# Altium PCB v4.PcbDoc
Units mil, origin at the board's own origin, x right, y up, seen from the top; angles counter-clockwise.
Board outline 6440.66 x 6115.99 mil, 2 copper layers (Top Layer, Bottom Layer 1); 117 components, 72 nets, 348 pads, 98 vias.
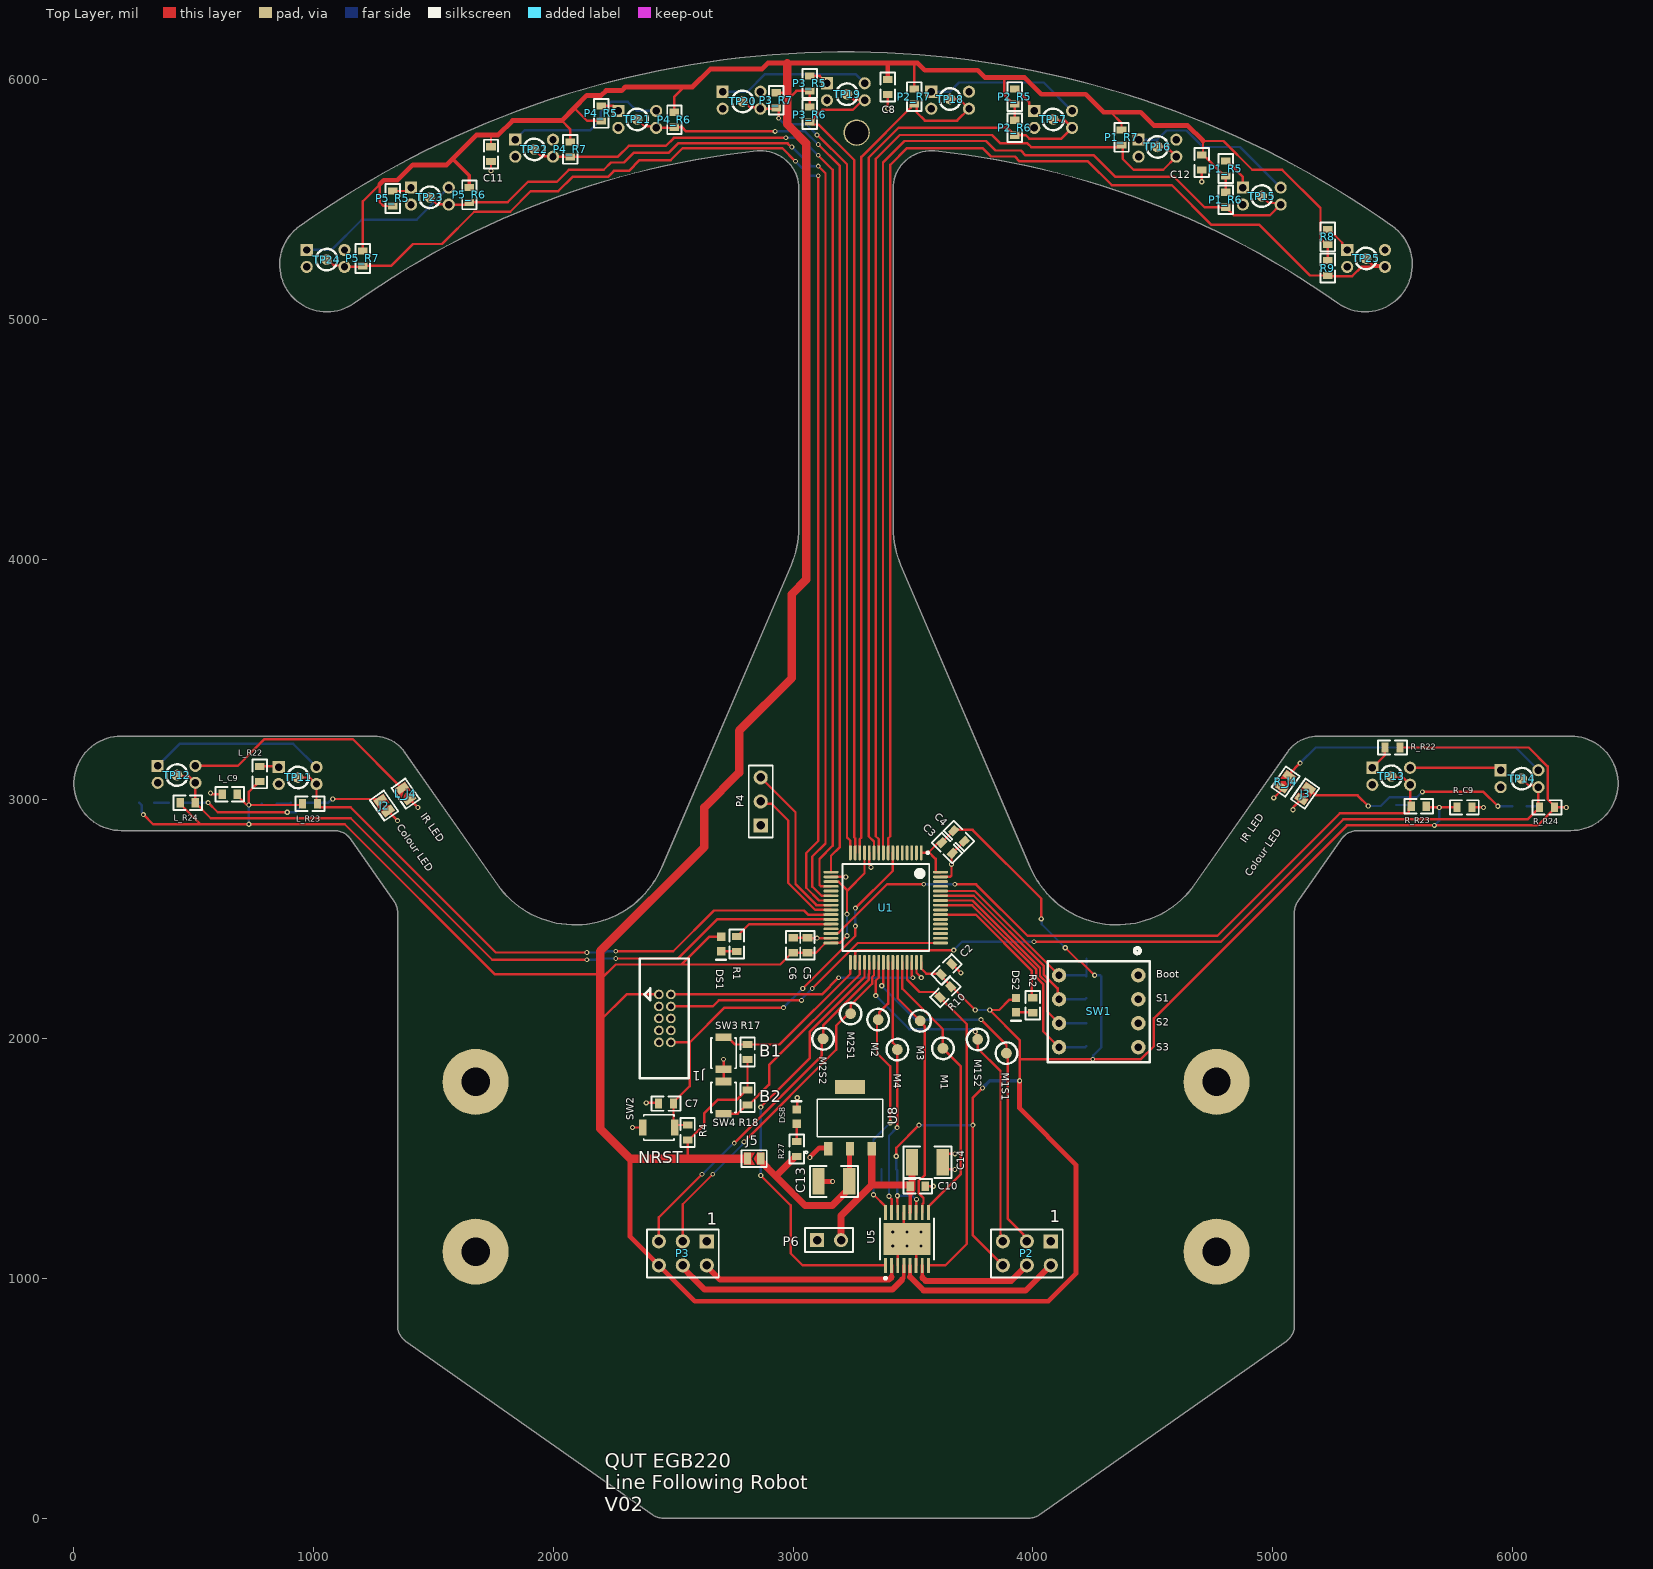
[diagram p0: Top Layer view]
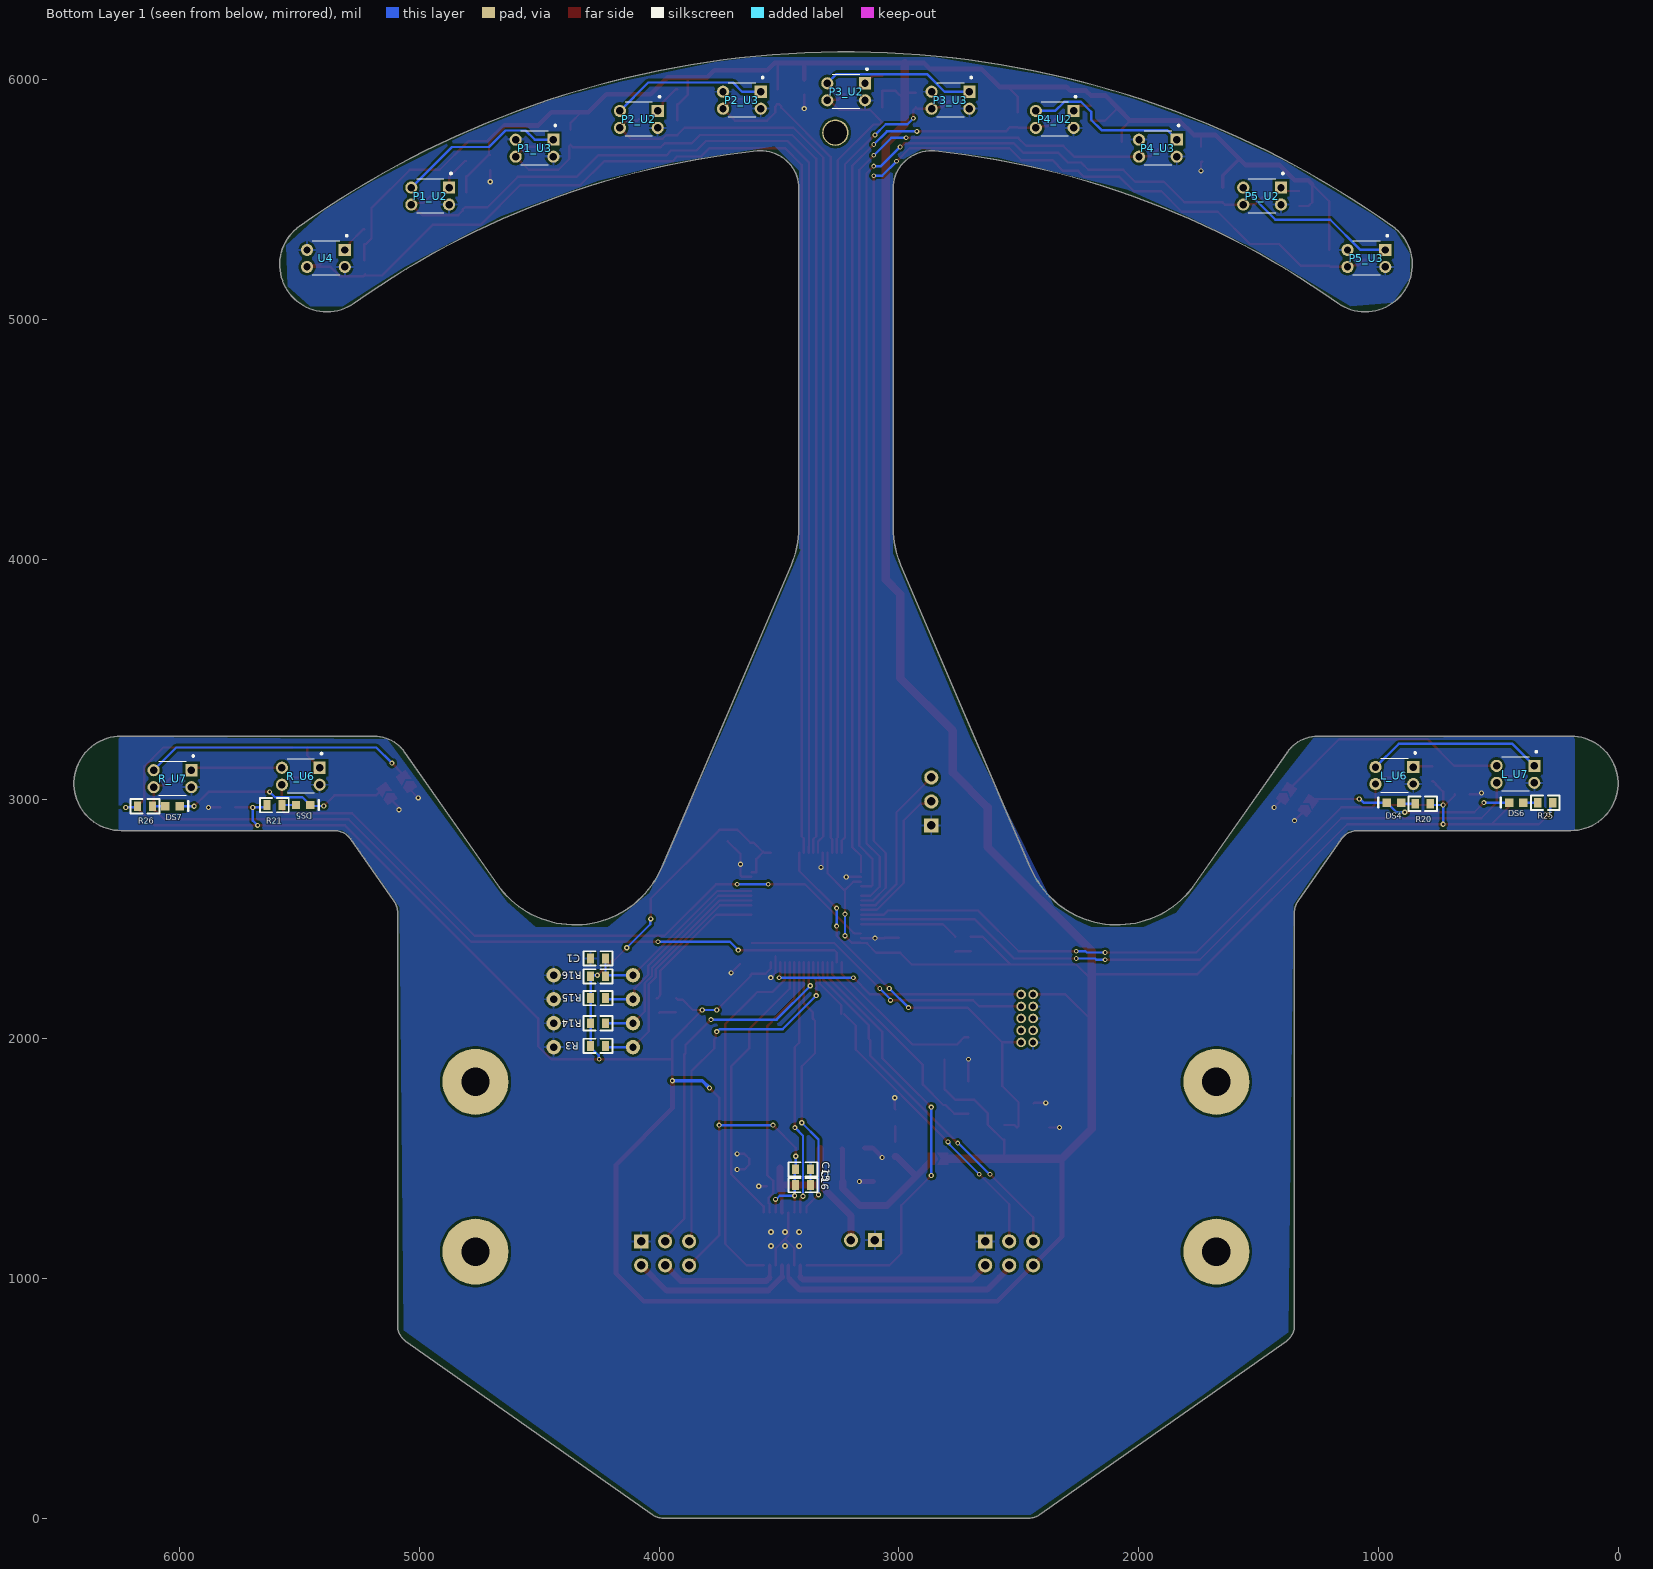
[diagram p1: Bottom Layer 1 view, seen from below]
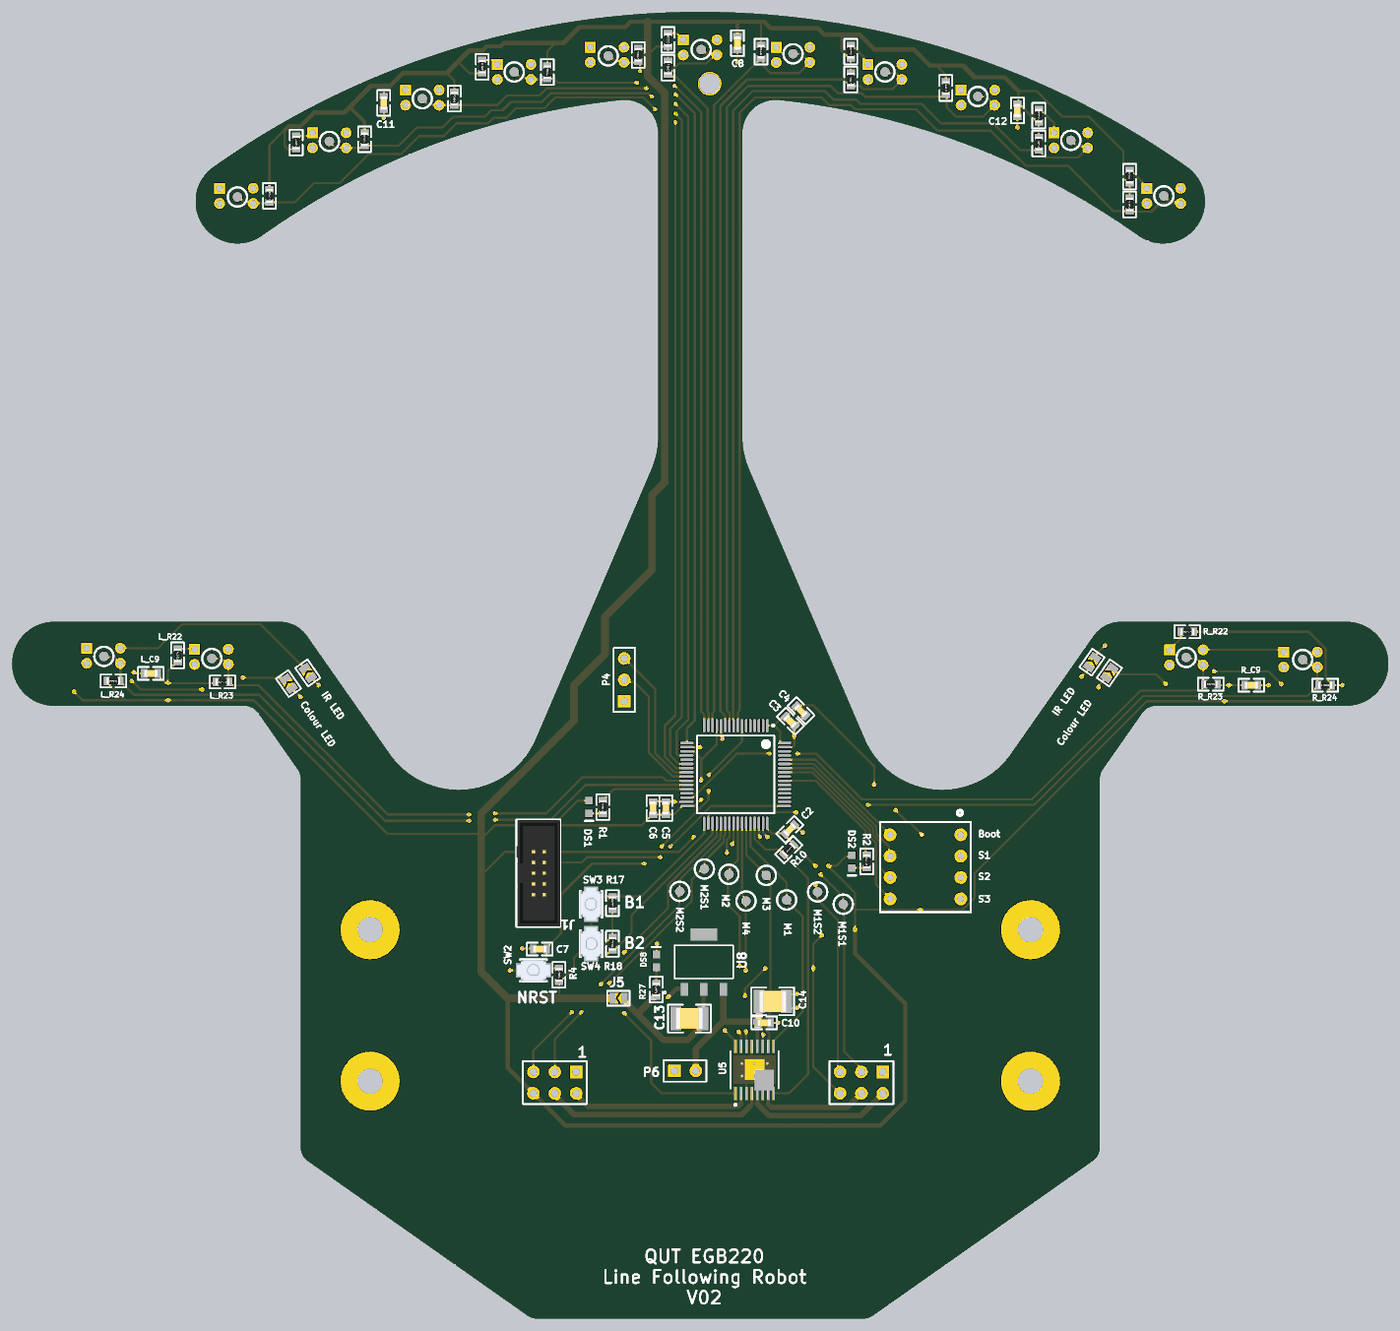
[diagram p2: 3D render of the assembled board from above, using the file's embedded part models]

## Layer stack, top to bottom
Top Solder: solder mask 1, SM-002, Dk 4
Top Layer: signal copper 1.4
Dielectric 1: prepreg 12.6, Composite dielectric, Dk 4.1
Bottom Layer 1: signal copper 1.4
Bottom Solder: solder mask 1, SM-002, Dk 4

## Board outline
1384.07,738.54 cw(c1429.38,802.94) 1350.64,802.94 1350.64,2526.66 ccw(c1271.9,2526.66) 1336.4,2571.82 1152.27,2834.78 ccw(c1087.77,2789.62) 1087.77,2868.36 197.1,2868.36 cw(c197.1,3065.21) 197.1,3262.06 1251.73,3262.06 cw(c1251.73,3104.58) 1380.73,3194.91 1767.09,2643.14 ccw(c2089.59,2868.96) 2451.45,2713.86 2992.04,3975.18 ccw(c2630.17,4130.28) 3023.87,4130.28 3023.87,5546.62 ccw(c2866.39,5546.62) 2849.91,5703.23 ccw(c3220.72,2179.38) 1169.33,5068.47 cw(c1055.37,5228.98) 941.4,5389.48 cw(c3220.72,2179.38) 5500.04,5389.48 cw(c5386.08,5228.98) 5272.11,5068.47 ccw(c3220.72,2179.38) 3591.53,5703.23 ccw(c3575.05,5546.62) 3417.57,5546.62 3417.57,4130.28 ccw(c3811.27,4130.28) 3449.41,3975.18 3989.99,2713.86 ccw(c4351.86,2868.96) 4674.36,2643.14 5060.71,3194.91 cw(c5189.71,3104.58) 5189.71,3262.06 6244.34,3262.06 cw(c6244.34,3065.21) 6244.34,2868.36 5353.67,2868.36 ccw(c5353.67,2789.62) 5289.17,2834.78 5105.04,2571.82 ccw(c5169.54,2526.66) 5090.8,2526.66 5090.8,802.94 cw(c5012.06,802.94) 5057.37,738.54 4028.51,14.59 cw(c3983.2,78.99) 3983.2,0.25 2458.25,0.25 cw(c2458.25,78.99) 2412.94,14.59

## Design rules (kind name [scope] priority, off if disabled: settings)
Clearance [All] p1: gap=10 ignorepadtopadclearanceinfootprint=FALSE except(0: Arc-Hole Track-Hole SMDPad-Hole THPad-Hole Via-Hole Fill-Hole Poly-Hole Region-Hole Text-Hole; 5: Arc-Arc Arc-Track Arc-SMDPad Track-Track Track-SMDPad SMDPad-SMDPad; 8: Arc-THPad Arc-Via Track-THPad Track-Via SMDPad-THPad SMDPad-Via THPad-THPad THPad-Via)
PlaneConnect [All] p1: pad.planeconnectstyle=Relief pad.reliefexpansion=20 pad.reliefentries=4 pad.reliefconductorwidth=15 pad.reliefairgap=10 via.planeconnectstyle=Direct via.reliefexpansion=20 via.reliefentries=4 via.reliefconductorwidth=10 via.reliefairgap=10
PolygonConnect [All] p1: thpad.connectstyle=Relief thpad.reliefconductorwidth=10 thpad.reliefentries=4 thpad.polygonreliefangle="90 Angle" thpad.airgapwidth=10 smdpad.connectstyle=Relief smdpad.reliefconductorwidth=10 smdpad.reliefentries=4 smdpad.polygonreliefangle="90 Angle" smdpad.airgapwidth=10 via.connectstyle=Direct via.reliefconductorwidth=10 via.reliefentries=4 via.polygonreliefangle="90 Angle" via.airgapwidth=10
RoomDefinition R [InComponentClass('R')] p1: confinementstyle=ConfineIn formatcopy=TRUE lockcomponents=FALSE outline 4780,2685 6275,2685 6275,3365 4780,3365
RoomDefinition "Power Supply" [InComponentClass('Power Supply')] p2 off: confinementstyle=ConfineIn formatcopy=TRUE lockcomponents=FALSE outline 3625,850 3625,1780 2970,1780 2970,850
RoomDefinition EGB220 [InComponentClass('EGB220')] p3 off: confinementstyle=ConfineIn formatcopy=TRUE lockcomponents=FALSE outline 2205,1385 4735,1385 4735,3918.13 2205,3918.13
RoomDefinition P4 [InComponentClass('P4')] p4 off: confinementstyle=ConfineIn formatcopy=TRUE lockcomponents=FALSE outline 1740,5535 2550,5535 2550,5955 1740,5955
RoomDefinition P1 [InComponentClass('P1')] p5 off: confinementstyle=ConfineIn formatcopy=TRUE lockcomponents=FALSE outline 4330,5210 5140,5210 5140,5905 4330,5905
RoomDefinition L [InComponentClass('L')] p6: confinementstyle=ConfineIn formatcopy=TRUE lockcomponents=FALSE outline 220.37,2697.94 1750,2697.94 1750,3377.94 220.37,3377.94
RoomDefinition P2 [InComponentClass('P2')] p7 off: confinementstyle=ConfineIn formatcopy=TRUE lockcomponents=FALSE outline 3445,5575 4235,5575 4235,6140 3445,6140
RoomDefinition "Front Sense Array" [InComponentClass('Front Sense Array')] p8 off: confinementstyle=ConfineIn formatcopy=TRUE lockcomponents=FALSE outline 5155,5000 5605,5000 5605,5505 5155,5505
RoomDefinition P5 [InComponentClass('P5')] p9 off: confinementstyle=ConfineIn formatcopy=TRUE lockcomponents=FALSE outline 855,5090 1695,5090 1695,5640 855,5640
RoomDefinition P3 [InComponentClass('P3')] p10 off: confinementstyle=ConfineIn formatcopy=TRUE lockcomponents=FALSE outline 2570,5725 3345,5725 3345,6105 2570,6105
RoomDefinition "Motor Control" [InComponentClass('Motor Control')] p11: confinementstyle=ConfineIn formatcopy=TRUE lockcomponents=FALSE outline 1760,755 4660,755 4660,2285 1760,2285
RoutingVias [All] p1: holewidth=11 width=20 viastyle="Through Hole" minholewidth=11 minwidth=20 maxholewidth=28 maxwidth=50
SolderMaskExpansion [All] p1: expansion=4 istentingtop=FALSE
Width [All] p1: maxlimit=35 minlimit=10 preferedwidth=10 minimp=50.000000 maximp=50.000000 favimp=50.000000
29 further rules are at their usual default settings.

## Classes and differential pairs
channel class SideSense: L R
channel class SensePair: L P1 P2 P3 P4 P5 R
net class M2Sense[1..2]: M2Sense1 M2Sense2
net class M1Sense[1..2]: M1Sense1 M1Sense2
net class FADC[1..11]: FADC1 FADC2 FADC3 FADC4 FADC5 FADC6 FADC7 FADC8 FADC9 FADC10 FADC11
component class P5: P5_R5 P5_R6 P5_R7 P5_U2 P5_U3
component class P4: P4_R5 P4_R6 P4_R7 P4_U2 P4_U3
component class P3: P3_R5 P3_R6 P3_R7 P3_U2 P3_U3
component class P2: 10K 47R P2_R5 P2_R6 P2_R7 P2_U2 P2_U3
component class P1: 10K 47R P1_R5 P1_R6 P1_R7 P1_U2 P1_U3
component class R: R_C9 R_J4 R_R22 R_R23 R_R24 R_U6 R_U7
component class "Power Supply": C13 DS8 J5 P6 R27 U8
component class "Motor Control": 3 C10 C14 C15 C16 M1 M1S1 M1S2 M2 M2S1 M2S2 M3 M4 P2 P3 R10 U5
component class L: L_C9 L_J4 L_R22 L_R23 L_R24 L_U6 L_U7
component class "Front Sense Array": 10K 100R C8 R8 R9 TP15 TP16 TP17 TP18 TP19 TP20 TP21 TP22 TP23 TP24 TP25 U4
component class EGB220: C1 C2 C3 C4 C5 C6 C7 C11 C12 DS1 DS2 DS4 DS5 DS6 DS7 J1 J2 J3 P4 R1 R2 R3 R4 R14 R15 R16 R17 R18 R20 R21 R25 R26 SW1 SW2 SW3 SW4 TP11 TP12 TP13 TP14 U1

## Components (designator, comment, footprint, x,y, rotation, side; value= is the part's Value field where it differs from the comment)
C1 "100nF" Cap_Ceramic_0603 4255,2335 r180 bottom
C2 "100nF" Cap_Ceramic_0603 3640,2290 r225 top
C3 "100nF" Cap_Ceramic_0603 3642.32,2796.11 r135 top
C4 "100nF" Cap_Ceramic_0603 3691.82,2845.61 r135 top
C5 "100nF" Cap_Ceramic_0603 3060,2390 r270 top
C6 "4u7" Cap_Ceramic_0603 3000,2390 r270 top
C7 "100nF" Cap_Ceramic_0603 2470,1730 r0 top
C8 "100nF" Cap_Ceramic_0603 3395,5970 r90 top
C10 "100nF 100V 5% X7R 0603" Cap_Ceramic_0603 3520,1385 r180 top
C11 "100nF" Cap_Ceramic_0603 1740,5690 r90 top
C12 "100nF" Cap_Ceramic_0603 4705,5655 r90 top
C13 "47uF 16V 10% X7R 1210" Cap_Ceramic_1210 3170,1405 r0 top
C14 "47uF 16V 10% X7R 1210" Cap_Ceramic_1210 3560,1485 r180 top
C15 "100nF 100V 5% X7R 0603" Cap_Ceramic_0603 3400,1455 r0 bottom
C16 "4u7 50V 5% X7R 0603" Cap_Ceramic_0603 3400,1390 r0 bottom
DS1 "LED Green 0603" "LED GREEN 0603" 2700,2395 r270 top
DS2 "LED Blue 0603" "LED BLUE 0603" 3930,2140 r270 top
DS4 "LED Green 0603" "LED GREEN 0603" 935,2985 r0 bottom
DS5 "LED Green 0603" "LED GREEN 0603" 5485,2975 r180 bottom
DS6 "LED Green 0603" "LED GREEN 0603" 425,2985 r0 bottom
DS7 "LED Green 0603" "LED GREEN 0603" 6030,2970 r180 bottom
DS8 "LED Red 0603" "LED RED 0603" 3015,1675 r90 top
J1 "IDC 10P 2x5 1.27mm" "IDC 1.27MM 10P" 2465,2085 r270 top
J2 "Jumper 2Way Solderable" Jumper_2Way_Solderable 1310,2950 r35 top
J3 "Jumper 2Way Solderable" Jumper_2Way_Solderable 5120,3000 r325 top
J5 "Jumper 2Way Solderable" Jumper_2Way_Solderable 2865,1500 r90 top
L_C9 "100nF" Cap_Ceramic_0603 650,3020 r0 top (schematic designator C9)
L_J4 "Jumper 2Way Solderable" Jumper_2Way_Solderable 1400,3000 r35 top (schematic designator J4)
L_R22 "47R 5% 0603" Res_ThinFilm_0603 775,3105 r270 top (schematic designator R22)
L_R23 "47k 5% 0603" Res_ThinFilm_0603 985,2980 r0 top (schematic designator R23)
L_R24 "47k 5% 0603" Res_ThinFilm_0603 475,2985 r0 top (schematic designator R24)
L_U6 "QRE1113" DIP400W50P180L360H200Q4 933.27,3097.94 r270 bottom (schematic designator U6)
L_U7 "QRE1113" DIP400W50P180L360H200Q4 428.27,3102.94 r270 bottom (schematic designator U7)
M1 "TestPoint_SMD" TestPointSMD 3625,1960 r0 top
M1S1 "TestPoint_SMD" TestPointSMD 3890,1940 r90 top
M1S2 "TestPoint_SMD" TestPointSMD 3770,1997.5 r0 top
M2 "TestPoint_SMD" TestPointSMD 3355,2080 r0 top
M2S1 "TestPoint_SMD" TestPointSMD 3240,2105 r90 top
M2S2 "TestPoint_SMD" TestPointSMD 3125,2000 r0 top
M3 "TestPoint_SMD" TestPointSMD 3530,2075 r0 top
M4 "TestPoint_SMD" TestPointSMD 3435,1955 r0 top
P1_R5 "47R 5% 0603" Res_ThinFilm_0603 4805,5630 r270 top (schematic designator R5)
P1_R6 "47k 5% 0603" Res_ThinFilm_0603 4805,5500 r270 top (schematic designator R6)
P1_R7 "47k 5% 0603" Res_ThinFilm_0603 4370,5760 r270 top (schematic designator R7)
P1_U2 "QRE1113" DIP400W50P180L360H200Q4 4955,5515 r270 bottom (schematic designator U2)
P1_U3 "QRE1113" DIP400W50P180L360H200Q4 4520,5715 r270 bottom (schematic designator U3)
P2 "Header 3X2" HDR2X3 4075,1155 r180 top
P2_R5 "47R 5% 0603" Res_ThinFilm_0603 3925,5930 r270 top (schematic designator R5)
P2_R6 "47k 5% 0603" Res_ThinFilm_0603 3925,5800 r270 top (schematic designator R6)
P2_R7 "47k 5% 0603" Res_ThinFilm_0603 3505,5930 r270 top (schematic designator R7)
P2_U2 "QRE1113" DIP400W50P180L360H200Q4 4085,5835 r270 bottom (schematic designator U2)
P2_U3 "QRE1113" DIP400W50P180L360H200Q4 3655,5915 r270 bottom (schematic designator U3)
P3 "Header 3X2" HDR2X3 2640,1155 r180 top
P3_R5 "47R 5% 0603" Res_ThinFilm_0603 3070,5985 r270 top (schematic designator R5)
P3_R6 "47k 5% 0603" Res_ThinFilm_0603 3070,5855 r270 top (schematic designator R6)
P3_R7 "47k 5% 0603" Res_ThinFilm_0603 2930,5915 r270 top (schematic designator R7)
P3_U2 "QRE1113" DIP400W50P180L360H200Q4 3220,5950 r270 bottom (schematic designator U2)
P3_U3 "QRE1113" DIP400W50P180L360H200Q4 2785,5915 r270 bottom (schematic designator U3)
P4 "UART" HDR1X3 2865,2890 r90 top
P4_R5 "47R 5% 0603" Res_ThinFilm_0603 2200,5860 r270 top (schematic designator R5)
P4_R6 "47k 5% 0603" Res_ThinFilm_0603 2505,5833.76 r270 top (schematic designator R6)
P4_R7 "47k 5% 0603" Res_ThinFilm_0603 2070,5710 r270 top (schematic designator R7)
P4_U2 "QRE1113" DIP400W50P180L360H200Q4 2350,5835 r270 bottom (schematic designator U2)
P4_U3 "QRE1113" DIP400W50P180L360H200Q4 1920,5715 r270 bottom (schematic designator U3)
P5_R5 "47R 5% 0603" Res_ThinFilm_0603 1330,5505 r270 top (schematic designator R5)
P5_R6 "47k 5% 0603" Res_ThinFilm_0603 1650,5520 r270 top (schematic designator R6)
P5_R7 "47k 5% 0603" Res_ThinFilm_0603 1205,5255 r270 top (schematic designator R7)
P5_U2 "QRE1113" DIP400W50P180L360H200Q4 1485,5515 r270 bottom (schematic designator U2)
P5_U3 "QRE1113" DIP400W50P180L360H200Q4 1050,5255 r270 bottom (schematic designator U3)
P6 "Header 2" HDR1X2 3100,1160 r0 top
R1 "100R 5% 0603" Res_ThinFilm_0603 2765,2395 r270 top
R2 "100R 5% 0603" Res_ThinFilm_0603 4000,2140 r270 top
R3 "4k7 5% 0603" Res_ThinFilm_0603 4255,1970 r0 bottom
R4 "4k7 5% 0603" Res_ThinFilm_0603 2560,1609.35 r90 top
R8 "100R 5% 0603" Res_ThinFilm_0603 5230,5345 r270 top
R9 "47k 5% 0603" Res_ThinFilm_0603 5230,5215 r270 top
R10 "10k 5% 0603" Res_ThinFilm_0603 3635,2195 r45 top
R14 "4k7 5% 0603" Res_ThinFilm_0603 4255,2065 r0 bottom
R15 "4k7 5% 0603" Res_ThinFilm_0603 4255,2170 r0 bottom
R16 "4k7 5% 0603" Res_ThinFilm_0603 4255,2260 r180 bottom
R17 "4k7 5% 0603" Res_ThinFilm_0603 2810,1945 r270 top
R18 "4k7 5% 0603" Res_ThinFilm_0603 2810,1755 r90 top
R20 "560R 5% 0603" Res_ThinFilm_0603 815,2980 r180 bottom
R21 "560R 5% 0603" Res_ThinFilm_0603 5605,2975 r0 bottom
R25 "560R 5% 0603" Res_ThinFilm_0603 303.76,2985 r180 bottom
R26 "560R 5% 0603" Res_ThinFilm_0603 6145,2970 r0 bottom
R27 "100R 5% 0603" Res_ThinFilm_0603 3015,1540 r90 top
R_C9 "100nF" Cap_Ceramic_0603 5800,2965 r180 top (schematic designator C9)
R_J4 "Jumper 2Way Solderable" Jumper_2Way_Solderable 5038.45,3049.95 r325 top (schematic designator J4)
R_R22 "47R 5% 0603" Res_ThinFilm_0603 5500,3215 r0 top (schematic designator R22)
R_R23 "47k 5% 0603" Res_ThinFilm_0603 5610,2970 r180 top (schematic designator R23)
R_R24 "47k 5% 0603" Res_ThinFilm_0603 6145,2965 r180 top (schematic designator R24)
R_U6 "QRE1113" DIP400W50P180L360H200Q4 5495,3095 r270 bottom (schematic designator U6)
R_U7 "QRE1113" DIP400W50P180L360H200Q4 6030,3085 r270 bottom (schematic designator U7)
SW1 "SM1020" SM1020 4109.29,2265 r270 top
SW2 "B3U-1000P" FP-B3U-1000P-MFG 2440,1630 r180 top
SW3 "B3U-1000P" FP-B3U-1000P-MFG 2710,1940 r270 top
SW4 "B3U-1000P" FP-B3U-1000P-MFG 2710,1755 r90 top
TP11 "TestPoint_SMD" TestPointSMD 935,3090 r90 top
TP12 "TestPoint_SMD" TestPointSMD 430,3100 r90 top
TP13 "TestPoint_SMD" TestPointSMD 5495,3095 r90 top
TP14 "TestPoint_SMD" TestPointSMD 6040,3085 r90 top
TP15 "TestPoint_SMD" TestPointSMD 4955,5515 r90 top
TP16 "TestPoint_SMD" TestPointSMD 4519.76,5720.24 r90 top
TP17 "TestPoint_SMD" TestPointSMD 4085,5835 r90 top
TP18 "TestPoint_SMD" TestPointSMD 3655,5920 r270 top
TP19 "TestPoint_SMD" TestPointSMD 3225,5940 r90 top
TP20 "TestPoint_SMD" TestPointSMD 2790,5910 r90 top
TP21 "TestPoint_SMD" TestPointSMD 2350,5835 r90 top
TP22 "TestPoint_SMD" TestPointSMD 1920,5710 r90 top
TP23 "TestPoint_SMD" TestPointSMD 1485,5510 r90 top
TP24 "TestPoint_SMD" TestPointSMD 1055,5250 r0 top
TP25 "TestPoint_SMD" TestPointSMD 5390,5255 r90 top
U1 "STM32F302R6T6" STM-LQFP64_L 3386.65,2547.36 r270 top
U4 "QRE1113" DIP400W50P180L360H200Q4 5390,5255 r270 bottom
U5 "IC_Texas_Instruments_DRV8848PWP_eec" Texas_Instruments_PWP_R-PDSO-G16_0 3475,1165 r0 top
U8 "SPX1117M3-L-3-3/TR" SOT223-3_MXL 3237.51,1670 r0 top

## Footprints (in the part's own frame and the unit in brackets; to place one, negate y for a bottom-side part, rotate by r counter-clockwise, add the part's x,y. Pads: shape width x height; smd on the part's side, far side on the other; paste and mask are expansions set on the pad)
Cap_Ceramic_0603 [mil]
  rect 30x40 smd: 1(-31.24,0) 2(31.24,0)
  silkscreen extent -60,-30 60,30, body extent -31,-16 31,16, height 33
Cap_Ceramic_1210 [mm]
  rect 1.3x2.8 smd: 1(-1.625,0) 2(1.625,0)
  silkscreen extent -2.54,-1.65 2.54,1.65, body extent -1.6,-1.25 1.6,1.25, height 1.35
DIP400W50P180L360H200Q4 [mm]
  rect 1.288x1.288 hole 0.78: 1(-0.9,2)
  round 1.288 hole 0.78: 2(-0.9,-2) 3(0.9,-2) 4(0.9,2)
  silkscreen extent -2.5,-1.45 1.8,2.3
FP-B3U-1000P-MFG [mm]
  rect 0.8x1.7 smd paste+0 mask+0: 1(-1.7,0) 2(1.7,0)
  silkscreen extent -1.6,-1.35 1.6,1.35, body extent -2.2,-1.45 2.2,1.45, height 0.25
HDR1X2 [mm] "Connector; Header; 2 Position"
  rect 1.5x1.5 hole 0.9: 1(0,0)
  round 1.5 hole 0.9: 2(2.54,0)
  silkscreen extent -1.27,-1.27 3.81,1.27
HDR1X3 [mm] "Connector; Header; 3 Position"
  rect 1.5x1.5 hole 0.9: 1(0,0)
  round 1.5 hole 0.9: 2(2.54,0) 3(5.08,0)
  silkscreen extent -1.27,-1.27 6.35,1.27
HDR2X3 [mm] "Connector; Header; 3x2 Position"
  rect 1.5x1.5 hole 0.9: 1(0,0)
  round 1.5 hole 0.9: 2(0,2.54) 3(2.54,0) 4(2.54,2.54) 5(5.08,0) 6(5.08,2.54)
  silkscreen extent -1.27,-1.27 6.35,3.81
"IDC 1.27MM 10P" [mil]
  round 40 hole 25: 1(-100,-25) 2(-100,25) 3(-50,-25) 4(-50,25) 5(0,-25) 6(0,25) 7(50,-25) 8(50,25) 9(100,-25) 10(100,25)
  silkscreen extent -250,-105 250,100, body extent -249,-104 249,100, height 214
Jumper_2Way_Solderable [mil]
  rect 50x30 smd: 1(0,55) 2(0,0)
  Top Layer region: -25,25 0,40 25,25 25,70 -25,70
  Top Layer region: -25,15 0,30 25,15 25,-15 0,-15 -25,-15
  silkscreen extent -35,-25 35,80
"LED BLUE 0603" [mil]
  rect 35x35 smd: 1(-30,0) 2(30,0)
  silkscreen extent 65,-20 65,20, body extent -40,-20 40,20, height 30
"LED GREEN 0603" [mil]
  rect 35x35 smd: 1(-30,0) 2(30,0)
  silkscreen extent 65,-20 65,20, body extent -40,-20 40,20, height 30
"LED RED 0603" [mil]
  rect 35x35 smd: 1(-30,0) 2(30,0)
  silkscreen extent 65,-20 65,20, body extent -40,-20 40,20, height 30
Res_ThinFilm_0603 [mil]
  rect 30x40 smd: 1(-31.24,0) 2(31.24,0)
  silkscreen extent -60,-30 60,30, body extent -31,-16 32,16, height 18
SM1020 [mil]
  round 60 hole 30: 1(0,330.71) 2(100,330.71) 3(200,330.71) 4(300,330.71) 5(0,0) 6(100,0) 7(200,0) 8(300,0)
  silkscreen extent -117,-47 362,378, body extent -30,0 331,331, height 118
SOT223-3_MXL [mil]
  rect 35x58 smd paste+0 mask+0: 1(-91,-128.5) 2(0,-128.5) 3(91,-128.5)
  rect 124x58 smd paste+0 mask+0: 4(0,128.5)
  silkscreen extent -187,-148 137,78, body extent 0,0 10,10, height 10
STM-LQFP64_L [mm] "QFP, 64-Leads, Body 10x10mm, Pitch 0.5mm, IPC High Density"
  oval 1.6x0.3 smd: 1(-5.8,3.75) 2(-5.8,3.25) 3(-5.8,2.75) 4(-5.8,2.25) 5(-5.8,1.75) 6(-5.8,1.25) 7(-5.8,0.75) 8(-5.8,0.25) 9(-5.8,-0.25) 10(-5.8,-0.75) 11(-5.8,-1.25) 12(-5.8,-1.75) 13(-5.8,-2.25) 14(-5.8,-2.75) 15(-5.8,-3.25) 16(-5.8,-3.75) 33(5.8,-3.75) 34(5.8,-3.25) 35(5.8,-2.75) 36(5.8,-2.25) 37(5.8,-1.75) 38(5.8,-1.25) 39(5.8,-0.75) 40(5.8,-0.25) 41(5.8,0.25) 42(5.8,0.75) 43(5.8,1.25) 44(5.8,1.75) 45(5.8,2.25) 46(5.8,2.75) 47(5.8,3.25) 48(5.8,3.75)
  oval 0.3x1.6 smd: 17(-3.75,-5.8) 18(-3.25,-5.8) 19(-2.75,-5.8) 20(-2.25,-5.8) 21(-1.75,-5.8) 22(-1.25,-5.8) 23(-0.75,-5.8) 24(-0.25,-5.8) 25(0.25,-5.8) 26(0.75,-5.8) 27(1.25,-5.8) 28(1.75,-5.8) 29(2.25,-5.8) 30(2.75,-5.8) 31(3.25,-5.8) 32(3.75,-5.8) 49(3.75,5.8) 50(3.25,5.8) 51(2.75,5.8) 52(2.25,5.8) 53(1.75,5.8) 54(1.25,5.8) 55(0.75,5.8) 56(0.25,5.8) 57(-0.25,5.8) 58(-0.75,5.8) 59(-1.25,5.8) 60(-1.75,5.8) 61(-2.25,5.8) 62(-2.75,5.8) 63(-3.25,5.8) 64(-3.75,5.8)
  silkscreen extent -5.92,-4.6 4.6,4.6, body extent -5,-5 5,5, height 1.6
TestPointSMD [mil]
  round 45 smd: 1(0,0)
  silkscreen extent -45,-45 45,45
Texas_Instruments_PWP_R-PDSO-G16_0 [mm]
  rect 0.3x1.6 smd paste-1000 mask+0: 1(-2.275,-2.8) 2(-1.625,-2.8) 3(-0.975,-2.8) 4(-0.325,-2.8) 5(0.325,-2.8) 6(0.975,-2.8) 7(1.625,-2.8) 8(2.275,-2.8) 9(2.275,2.8) 10(1.625,2.8) 11(0.975,2.8) 12(0.325,2.8) 13(-0.325,2.8) 14(-0.975,2.8) 15(-1.625,2.8) 16(-2.275,2.8)
  rect 5x3.4 smd paste-1000 mask-1000: PPAD(0,0)
  silkscreen extent -2.85,-4.27 2.85,2.2

## Part data
C1 C2 C3 C4 C5 C7 C8 C11 C12 L_C9 R_C9: library part "100nF 50V 5% X7R 0603", "Capacitor, Ceramic, SMD, 100nF, 50V, 5%, X7R, 0603"
C6: library part "4u7 50V 5% X7R 0603", "Capacitor, Ceramic, SMD, 4u7, 50V, 5%, X7R, 0603"
C10 C15: "Capacitor, Ceramic, SMD, 100nF, 100V, 5%, X7R, 0603"
C13 C14: "Capacitor, Ceramic, SMD, 47uF, 16V, 5%, X7R, 1210"
C16: "Capacitor, Ceramic, SMD, 4u7, 50V, 5%, X7R, 0603"
J2 J3 J5: library part "Jumper 2Way Vert Solderable", "Jumper 2Way Vert Solderable"
L_J4 R_J4: library part "Jumper 2Way Side Solderable", "Jumper 2Way Side Solderable"
L_R22 P1_R5 P2_R5 P3_R5 P4_R5 P5_R5 R_R22: "Resistor, SMD, 47R, 0.1W, 5%, 0603"
L_R23 L_R24 P1_R6 P1_R7 P2_R6 P2_R7 P3_R6 P3_R7 P4_R6 P4_R7 P5_R6 P5_R7 R9 R_R23 R_R24: "Resistor, SMD, 47k, 0.1W, 5%, 0603"
L_U6 L_U7 P1_U2 P1_U3 P2_U2 P2_U3 P3_U2 P3_U3 P4_U2 P4_U3 P5_U2 P5_U3 R_U6 R_U7 U4: "Reflective Optical Sensor 0.197 _5mm_ 4-DIP _0.157, 4.00mm_", Package="DIP-4 ON Semiconductor", Availability=Unavailable, MF="ON Semiconductor", MP=QRE1113, Price=None, SnapEDA_Link=https://www.snapeda.com/parts/QRE1113/ON%20Semiconductor/view-part/2391104/?ref=snap
P2 P3: "Header, 3-Pin, Dual row", LatestRevisionDate=17-Jul-2002, LatestRevisionNote="Re-released for DXP Platform.", Publisher="Altium Limited"
P4: library part "Header 3", "Header, 3-Pin", LatestRevisionDate=17-Jul-2002, LatestRevisionNote="Re-released for DXP Platform.", Publisher="Altium Limited"
P6: "Header, 2-Pin", LatestRevisionDate=17-Jul-2002, LatestRevisionNote="Re-released for DXP Platform.", Publisher="Altium Limited"
R1 R2 R8 R27: library part "100R 5%, 0603", "Resistor, SMD, 100R, 0.1W, 5%, 0603"
R3 R4 R14 R15 R16 R17 R18: "Resistor, SMD, 4k7, 0.1W, 5%, 0603"
R10: "Resistor, SMD, 10k, 0.1W, 5%, 0603"
R20 R21 R25 R26: "Resistor, SMD, 560R, 0.1W, 5%, 0603"
SW1: "4 Pin DIL Switch"
SW2 SW3 SW4: library part CMP-2100-03586-2, "SWITCH TACTILE SPST-NO 0.05A 12V", Contact Current Rating=50mA, Contact Resistance=100mR, Insulation Resistance=100MR, Max Operating Temperature=70°C, Max Voltage Rating (DC)=12V, Min Operating Temperature=-25°C, Operating Force=1.5N, Package Quantity=1, Ratings="Dust Proof", Actuator Length=0.4mm, Actuator Type=Standard, Contact Material=Silver, Current Rating=50mA, Depth=2.5mm, Electrical Life=200000Cycles, Height=1.2mm, Illumination Type=Non-Illuminated, Lead Free="Lead Free", Length=4mm, Max Current Rating=50mA, Mechanical Life=200000Cycles, Mount="Surface Mount", Orientation=Straight, Packaging="Tape and Reel", Switch Function=Off-Mom, Switch Travel=0.15mm, Termination=SMD/SMT, Throw Configuration=SPST, Voltage Rating (DC)=12V, Weight=0.000776oz, Width=3mm
U1: library part CMP-0537-00017-1, "ARM Cortex-M4 32-bit MCU, 32 KB Flash, 16 KB Internal RAM, 51 I/Os, 64-Pin LQFP, -40 to 85 degC, Tray", I/Os (High Current)=51, Operating Frequency(F) (Processor speed) (MHz)=72, Package Description="64-Pin Low-profile Quad Flat Package, Body 10 x 10 mm, Pitch 0.5 mm", Package Reference=LQFP64, Supply Voltage(Vcc) min (V)=2, ComponentLink1Description="Manufacturer URL", ComponentLink1URL=http://www.st.com/, ComponentLink2Description=Datasheet, ComponentLink2URL=http://www.st.com/st-web-ui/static/active/en/resource/technical/document/datasheet/DM00093333.pdf, Core="ARM Cortex-M4", D/A Converter=1, DatasheetVersion="Rev. 5", FLASH Size (Prog) (kB)=32, Internal RAM Size (kB)=16, Mounting Technology="Surface Mount", Packing=Tray
U5: "IC MOTOR DRIVER PAR 16HTSSOP", Digikey Part Number=296-38514-5-ND, Manufacturer="Texas Instruments", Mfg Package Ident="PWP (R-PDSO-G16)", Mouser Part Number=595-DRV8848PWP, Part Number=DRV8848PWP, Temperature="-40°C to +85°C", Temperature Range High=+85°C, Temperature Range Low=-40°C, Voltage=18V, ComponentLink1Description=Upverter, ComponentLink1URL=https://upverter.com/upn/revision/bddc272fce7c23e8/, ComponentLink2Description=Datasheet, ComponentLink2URL=http://www.ti.com/lit/ds/symlink/drv8848.pdf, Digikey Description="IC MOTOR DRIVER PAR 16HTSSOP", helpURL=https://upverter.com/upn/revision/bddc272fce7c23e8/, Lead Free=yes, Package="PWP (R-PDSO-G16)", Price=1.93395746176, RoHS=TRUE, Supplier 1=Digi-Key, Supplier 2=Mouser, Supplier Part Number 1=296-38514-5-ND, Supplier Part Number 2=595-DRV8848PWP
U8: "No Description Available", Built_By=EMA_Molly, Copyright="Copyright (C) 2018 Accelerated Designs. All rights reserved", Manufacturer_Part_Number=SPX1117M3-L-3-3/TR, RefDes=RefDes, SourceLibrary=Max_Linear_2019-12-20, Type=DEV, Vendor="Max Linear"

## Free pads (board coordinates)
  round 275.59 hole 118.11: 2(1675.7,1820.61) 3(1675.7,1111.94) 4(4766.25,1820.61) 7(4766.25,1111.94)
  round 110 hole 98.43: 8(3265,5780)

## Via types
v1: diameter 21.65, hole 11, Top Layer to Bottom Layer 1, 45 vias
v2: diameter 20, hole 11, Top Layer to Bottom Layer 1, 29 vias
v3: diameter 21.65, hole 10.98, Top Layer to Bottom Layer 1, 18 vias
v4: diameter 24.8, hole 12.99, Top Layer to Bottom Layer 1, 6 vias

## Nets (pads, with @x,y where several pads share a name; then routed paths per layer and width w, separated by ;. In a path a pad name is that pad's centre, name@x,y a point inside that pad or via, vN(x,y) a via of type N, cw(c..) or ccw(c..) an arc to the next point about the centre after c; other vN are vias at no path point)
3V3: C2.2 C3.2 C4.2 C5.2 C6.2 C8.2 C11.2 C12.2 C15.2 C16.2 DS1.1 DS2.1 J1.1 J5.1 L_C9.2 L_R22.2 L_R23.1 L_R24.1 P1_R5.2 P1_R6.1 P1_R7.1 P2.6 P2_R5.2 P2_R6.1 P2_R7.1 P3.6 P3_R5.2 P3_R6.1 P3_R7.1 P4_R5.2 P4_R6.1 P4_R7.1 P5_R5.2 P5_R6.1 P5_R7.1 R3.2 R4.1 R8.2 R9.1 R10.2 R14.2 R15.2 R16.1 R17.2 R18.2 R20.2 R21.2 R25.2 R26.2 R_C9.2 R_R22.2 R_R23.1 R_R24.1 U1.1 U1.13 U1.19 U1.32 U1.48 U1.64 U5.11 U5.14 | length 28975.4
  Top Layer w10: v1(290,2935) 330,2895 528.76,2895 ; L_R24.1 443.76,2980 528.76,2895 ; L_C9.2 681.24,3015 719.01,2977.23 727.77,2977.23 v1(730,2975) ; L_R22.2 770,3073.76 760,3063.76 760,3060.43 730,3030.43 v1(730,2975) ; L_R23.1 948.76,2975 v1(730,2975) ; P5_R7.1@1205,5291.24 1205,5492.84 1275.77,5563.61 1275.77,5489.23 1291.24,5473.76 P5_R5.2 ; C11.2 1740,5770 ; 2035,5830 2070,5795 P4_R7.1 ; 2087.5,5882.5 2141.24,5828.76 P4_R5.2 ; 2195,2075 2305,2185 J1.1 ; 2195,2245 2260,2310 2534.12,2310 ; 2195,2270 1755,2270 1130,2895 v1(730,2895) 528.76,2895 ; P4_R6.1 2505,5930 2545,5970 ; 2560,1515 R4.1 2565,1578.12 2630,1643.12 2630,1690 2685,1745 2763.76,1745 2805,1786.24 R18.2 R17.2 ; DS1.1 2649.12,2425 2534.12,2310 ; P3_R7.1 2971.24,5946.24 2975,5950 ; 2975,5915 3013.76,5953.76 P3_R5.2 P3_R6.1 ; U1.19 3158.65,2655.28 3189.72,2655.28 3226.33,2618.67 ; v1(3225,2430) 3195.07,2400.07 3158.65,2400.07 U1.32 3133.21,2399.72 3132.37,2398.89 3132.37,2396.14 3095,2358.76 C5.2 C6.2 2995,2358.76 2946.24,2310 2534.12,2310 ; v1(3225,2520) 3225,2617.34 3226.33,2618.67 ; U1.13 3298.07,2690.41 3226.33,2618.67 ; v3(3430,1510) 3430,1545 v3(3525,1640) ; v3(3435,1345) 3435,1319.17 3435.71,1318.46 3435.71,1276.14 U5.14 ; P2_R7.1 3505,6070 ; U5.11 3514.19,1276.04 3514.19,1329.19 v3(3515,1330) ; U1.48 3534.29,2293.43 3556.27,2271.45 3614.38,2271.45 C2.2 3617.91,2262.09 v1(3760,2120) ; U1.1 3560.71,2775.71 3565,2780 ; U1.64 3595.25,2695 3594.41,2695.84 3594.41,2750.59 3565,2780 ; v1(3790,1795) 3750,1755 3750,1180 P2.6 ; 3880,6010 3880,5938.76 3920,5898.76 P2_R5.2 P2_R6.1 ; DS2.1 3923.36,2163.36 3903.36,2163.36 3860,2120 v1(3820,2120) 3945,1995 3945,1915 ; v1(3945,1825) 3945,1915 ; v1(4035,2500) 4035,2585 3748.77,2871.23 3673.27,2871.23 C4.2 C3.2 3606.09,2818.2 3567.9,2780 3565,2780 ; v1(4135,2380) 4191.71,2323.29 4199.3,2323.29 v1(4257.59,2265) ; 4325,5865 4370,5820 P1_R7.1 ; C12.2 4707.47,5686.24 C12.2@4710,5688.76 ; P1_R6.1 P1_R5.2 4800,5598.76 C12.2@4710,5688.76 ; R9.1 R8.2 5225,5313.76 5200,5338.76 5200,5465 5040,5625 4915,5625 4795,5745 4710,5745 C12.2@4710,5688.76 ; R_R22.2 6068.41,3215 6147.09,3136.32 6147.09,2999.14 6176.24,2970 R_R24.1 ; R_R23.1 5646.24,2965 v1(5695,2965) R_C9.2 ; v1(6225,2965) R_R24.1 ; 3945,1915 v2(4250,1915) 4450.81,1915 4505,1969.19 4505,2085 5310,2890 v1(5675,2890) 6106.24,2890 6176.24,2960 R_R24.1
  Top Layer w15: 1580,5670 1650,5600 P5_R6.1
  Top Layer w20: 1275.77,5563.61 1292.96,5580.81 1349.86,5580.81 1414.06,5645 1555,5645 1580,5670 1605,5695 1680,5770 1740,5770 1770,5770 1830,5830 2035,5830 2087.5,5882.5 2140,5935 2200,5935 2220,5955 2285,5955 2300,5970 2545,5970 2580,5970 2655,6045 2870,6045 2895,6070 2975,6070 3395,6070 ; 2320,1500 2320,1175 P3.6 2590,905 4065,905 4180,1020 4180,1475 3945,1710 v1(3945,1825) ; C8.2 3395,6070 ; 4710,5745 4645,5810 4505,5810 4450,5865 4325,5865 4295,5865 4220,5940 4035,5940 3965,6010 3880,6010 3800,6010 3770,6040 3550,6040 3520,6070 3505,6070 3395,6070
  Top Layer w35: J5.1@2800,1500 2320,1500 2195,1625 2195,2075 2195,2245 2195,2270 2195,2365 2630,2800 2630,2965 2775,3110 2775,3285 2995,3505 2995,3855 3055,3915 3055,5735 2975,5815 2975,5915 2975,5950 2975,6070
  Bottom Layer 1 w10: R25.2 282.53,2975 282.53,2945.63 ; v1(730,2895) v1(730,2975) 778.76,2975 R20.2 ; v1(3225,2430) v1(3225,2520) ; v3(3430,1510) 3430,1456.24 3435,1451.24 v3(3435,1345) 3496.85,1345 3511.85,1330 v3(3515,1330) ; v3(3525,1640) v3(3750,1640) ; v1(3760,2120) v1(3820,2120) ; v1(4035,2500) 4037.23,2497.77 4037.23,2477.77 v1(4135,2380) ; v2(4250,1915) 4251.91,1916.91 4251.91,1930.68 4286.24,1965 R3.2 R14.2 R15.2 R16.1 4281.24,2265 v1(4257.59,2265) ; R21.2 5646.24,2965 v1(5695,2965) 5695,2910 v1(5675,2890) ; R26.2 6181.24,2965 v1(6225,2965)
  Bottom Layer 1 w15: v1(3790,1795) 3820,1825 v1(3945,1825)
3V3_PSU: C13.2 J5.2 R27.1 U8.2 | length 777.4
  Top Layer w20: R27.1 R27.1@3020,1508.76 ; C13.2@3235.75,1406.76 3235.75,1539.74 U8.2
  Top Layer w30: J5.2 2865,1490 2925,1430 ; R27.1 3010,1508.76 2931.24,1430 2925,1430 ; C13.2 3233.99,1375.47 3163.52,1305 3050,1305 2925,1430
Boot: C1.2 R16.2 SW1.5 U1.60 | length 831.3
  Top Layer w10: U1.60 3758.03,2616.26 SW1.5
  Bottom Layer 1 w10: SW1.5 4218.76,2265 R16.2 4223.76,2265 C1.2
Button1: R17.1 SW3.1 U1.33 | length 711.6
  Top Layer w10: SW3.1 2727.72,2006.93 2758.41,1976.24 R17.1 2943.76,1976.24 3239.02,2271.49 U1.33
Button2: R18.1 SW4.1 U1.35 | length 907
  Top Layer w10: SW4.1 2769.31,1688.07 2805,1723.76 2815,1723.76 2900,1808.76 2900,1890 3278.39,2268.39 U1.35
FADC1: P1_R6.2 P1_U2.3 TP15.1 U1.9 | length 4819.3
  Top Layer w10: U1.9 3376.81,2801.79 3375,2803.6 3375,5655 3465,5745 3805,5745 3845,5705 3950,5705 3970,5685 4255,5685 4345,5595 4590,5595 4716.24,5468.76 4810,5468.76 4820,5458.76 4820,5453.76 4838.76,5435 4989.17,5435 P1_U2.3 5027.22,5486.09 4983.91,5486.09 TP15.1
FADC2: P1_R7.2 P1_U3.3 TP16.1 U1.10 | length 4412.7
  Top Layer w10: U1.10 3357.13,2832.87 3345,2845 3345,5670 3445,5770 3830,5770 3865,5735 3977.53,5735 3993.76,5718.76 4360,5718.76 P1_R7.2 4375,5723.76 4375,5670 4420,5625 4544.17,5625 P1_U3.3 4558.07,5720.24 TP16.1
FADC3: P2_R6.2 P2_U2.3 TP17.1 U1.11 | length 3939.6
  Top Layer w10: U1.11 3337.44,2822.56 3315,2845 3315,5675 3440,5800 3893.76,5800 P2_R6.2 3971.24,5768.76 3985,5755 4119.17,5755 P2_U2.3 4133.52,5829.79 4090.21,5829.79 TP17.1
FADC4: P2_R7.2 P2_U3.3 TP18.1 U1.14 | length 3612.2
  Top Layer w10: U1.14 3278.39,2833.39 3285,2840 3285,5678.76 3490,5883.76 3490,5888.76 3500,5898.76 P2_R7.2@3510,5898.76 ; P2_R7.2 3505.38,5898.76 3515.38,5888.76 3515.38,5864.62 3550,5830 3684.17,5830 P2_U3.3 3693.31,5920 TP18.1
FADC5: P3_R6.2 P3_U2.3 TP19.1 U1.15 | length 3484.1
  Top Layer w10: TP19.1 3230.2,5940 3254.12,5916.09 3289.57,5916.09 3297.22,5916.09 P3_U2.3 ; U1.15 3258.7,2801.79 3260,2803.09 3260,2835 3255,2840 3255,5665 3106.24,5813.76 3080,5813.76 P3_R6.2 3121.24,5875 3250,5875 P3_U2.3@3289.57,5914.57
FADC6: P3_R7.2 P3_U3.3 TP20.1 U1.16 | length 3445.6
  Top Layer w10: TP20.1 2795.2,5910 2819.12,5886.09 2857.22,5886.09 P3_U3.3 2924.09,5879.57 P3_R7.2@2930,5885.47 ; P3_R7.2 2939.5,5874.26 v2(2939.5,5840) ; v2(3100,5770) 3102.53,5770 3225,5647.53 3225,2840 3239.02,2825.98 U1.16
  Bottom Layer 1 w10: v2(2939.5,5840) 2964.5,5815 3055,5815 v2(3100,5770)
FADC7: P4_R6.2 P4_U2.3 TP21.1 U1.17 | length 3888.4
  Top Layer w10: TP21.1 2378.91,5806.09 2422.22,5806.09 P4_U2.3 2502.04,5799.57 P4_R6.2 2536.24,5802.53 2553.76,5785 v2(2925,5785) ; v2(3105,5730) 3195,5640 3195,2800 3158.31,2763.31 U1.17
  Bottom Layer 1 w10: v2(2925,5785) 3050,5785 v2(3105,5730)
FADC8: P4_R7.2 P4_U3.3 TP22.1 U1.20 | length 4402.4
  Top Layer w10: TP22.1 1948.91,5681.09 1997.22,5681.09 P4_U3.3 2069.2,5679.57 P4_R7.2 2070.8,5679.57 2269.57,5679.57 2315,5725 2470,5725 2503,5758 v2(2970,5758) ; v2(3105,5685) 3165,5625 3165,2805 3110,2750 3110,2642.15 3115.86,2636.29 3157.96,2636.29 U1.20
  Bottom Layer 1 w10: v2(2970,5758) 3032,5758 v2(3105,5685)
FADC9: P5_R6.2 P5_U2.3 TP23.1 U1.22 | length 4912.2
  Top Layer w10: TP23.1 1513.91,5481.09 1562.22,5481.09 P5_U2.3 1640.8,5479.57 P5_R6.2 1651.24,5490 1810,5490 1895,5575 2015,5575 2065,5625 2210,5625 2240,5655 2295,5655 2335,5695 2480,5695 2520,5735 2977.29,5735 2992.29,5720 v2(2995,5720) ; v2(3105,5640) 3135,5610 3135,2815 3080,2760 3080,2635 3118.43,2596.57 U1.22
  Bottom Layer 1 w10: v2(2995,5720) 3075,5640 v2(3105,5640)
FADC10: P5_R7.2 P5_U3.3 TP24.1 U1.23 | length 5431.5
  Top Layer w10: TP24.1 1060.2,5250 1084.12,5226.09 1122.22,5226.09 P5_U3.3 1200.8,5219.57 P5_R7.2 1206.24,5225 1325,5225 1415,5315 1535,5315 1670,5450 1820,5450 1905,5535 2020,5535 2080,5595 2227.43,5595 2252.43,5620 2315,5620 2360,5665 2490,5665 2540,5715 2955,5715 v2(3010,5660) ; v2(3105,5600) 3105,2825 3055,2775 3055,2630 3108.11,2576.89 U1.23
  Bottom Layer 1 w10: v2(3010,5660) 3070,5600 v2(3105,5600)
FADC11: R9.2 TP25.1 U1.8 U4.3 | length 5302.4
  Top Layer w10: U1.8 3396.5,2836.5 3405,2845 3405,5645 3475,5715 3790,5715 3825,5680 3925,5680 3945,5660 4230,5660 4330,5560 4580,5560 4745,5395 4945,5395 5156.24,5183.76 R9.2 5232.55,5181.21 5332.18,5181.21 5370.54,5219.57 U4.3 5462.22,5226.09 5418.91,5226.09 TP25.1 ; R9.2@5225.47,5190 R9.2@5230,5185.47
FAULT: R10.1 U1.45 U5.8 | length 1512.7
  Top Layer w10: U1.45 3475.24,2246.76 3527,2195 3590.83,2195 R10.1 3725,2060.83 3725,1145 3634.76,1054.76 U5.8
GND: C1.1 C2.1 C3.1 C4.1 C5.1 C6.1 C7.1 C8.1 C10.1 C11.1 C12.1 C13.1 C14.1 C15.1 C16.1 DS8.2 J1.3 J1.5 J1.9 J2.2 J3.2 L_C9.1 L_J4.2 L_U6.4 L_U7.4 P1_U2.4 P1_U3.2 P1_U3.4 P2.1 P2_U2.4 P2_U3.2 P2_U3.4 P3.1 P3_U2.4 P3_U3.2 P3_U3.4 P4.1 P4_U2.4 P4_U3.2 P4_U3.4 P5_U2.4 P5_U3.2 P5_U3.4 P6.1 R_C9.1 R_J4.2 R_U6.4 R_U7.4 SW1.1 SW1.2 SW1.3 SW1.4 SW2.2 SW3.2 SW4.2 U1.12 U1.18 U1.31 U1.47 U1.63 U4.2 U4.4 U5.3 U5.6 U5.13 U5.PPAD U8.1 | length 2126.6
  Top Layer w10: v1(570,3025) 575,3020 L_C9.1 ; J2.2 v1(1350,2910) ; L_J4.2 v1(1435,2965) ; C11.1@1735,5658.76 C11.1 v1(1740,5620) ; v1(2330,1630) SW2.2 ; v1(2387.23,1732.5) 2436.26,1732.5 C7.1 ; SW4.2 SW3.2 v2(2710,1915) ; C6.1 C5.1 3061.24,2420 v1(3100,2420) 3100.3,2419.7 3158.01,2419.7 U1.31 ; DS8.2 3017.5,1707.5 v1(3017.5,1754.35) ; U8.1@3143.01,1545 U8.1 ; v1(3220,2675) 3219.84,2675.16 U1.18@3158.47,2675.16 ; U1.12 3317.76,2725.4 3325,2718.15 v1(3325,2715) ; v1(3395,5880) C8.1 ; U5.3 3436.61,1126.61 U5.PPAD ; U5.13 3462.2,1177.8 U5.PPAD ; U5.6 3513.39,1126.61 U5.PPAD ; U1.47@3514.61,2345.1 3514.61,2275.39 v1(3535,2255) ; C10.1 v3(3585,1385) ; U1.63 3655.02,2675.31 3660.87,2681.17 3660.87,2770.49 C4.1 ; C2.1 3662.91,2312.09 v1(3700,2275) ; v3(3675,1455) 3644.58,1455 3623.99,1475.59 3623.99,1499.41 3644.58,1520 v3(3675,1520) ; v1(4705,5575) C12.1 ; v1(5005,3005) 5038.45,3038.45 R_J4.2 ; v1(5085,2955) 5087.23,2957.23 5087.23,2967.23 J3.2 ; R_C9.1 v1(5880,2965) ; U1.18@3158.47,2675.16 U1.18 U1.18@3158.47,2675.16
  Top Layer w20: v1(3070,1505) 3110,1545 U8.1@3143.01,1545 ; C13.1 v1(3165,1405)
  Bottom Layer 1 w10: C16.1 C15.1
  other v1: 3660.87,2728.18
  other v4: 3415.94,1135.47 3475,1135.47 3534.06,1135.47 3415.94,1194.53 3475,1194.53 3534.06,1194.53
L_IR_LED_Drain: L_J4.1 L_U7.2 | length 992.6
  Top Layer w10: L_U7.2 683.37,3138.37 795,3250 1163.51,3250 1358.47,3055.03 L_J4.1
L_IR_LED_Joiner: L_U6.2 L_U7.1 | length 740.5
  Bottom Layer 1 w10: L_U7.1 441.16,3230 915.38,3230 L_U6.2
LADC1: L_R23.2 L_U6.3 TP11.1 U1.26 | length 2654.1
  Top Layer w10: TP11.1 982.43,3090 1009.93,3062.51 L_U6.3 1012.01,2984.23 L_R23.2 1016.24,2975 1026.24,2965 1155,2965 1760,2360 v2(2140,2360) ; v2(2260,2365) 2500,2365 2670,2535 3045,2535 3062.17,2517.83 U1.26
  Bottom Layer 1 w10: v2(2140,2360) 2216.54,2360 2221.54,2365 v2(2260,2365)
LADC2: L_R24.2 L_U7.3 TP12.1 U1.27 | length 3166.3
  Top Layer w10: TP12.1 434,3096 478.43,3096 506.92,3067.51 L_U7.3 507.01,2985.77 L_R24.2 571.24,2920 1155,2920 1745,2330 v2(2140,2330) ; v2(2260,2335) 2520,2335 2683.15,2498.15 U1.27
  Bottom Layer 1 w10: v2(2140,2330) 2176.54,2330 2181.54,2335 v2(2260,2335)
LED_L: DS4.2 DS6.2 J2.1 | length 852.9
  Top Layer w10: v1(560,2985) 600,2945 v1(890,2945) ; v1(1080,3000) J2.1@1268.51,3000
  Bottom Layer 1 w10: DS6.2 v1(560,2985) ; v1(890,2945) 925,2945 DS4.2 1061.85,2985 1076.85,3000 v1(1080,3000)
LED_L_P1: DS6.1 R25.1 | length 60
  Bottom Layer 1 w10: R25.1 DS6.1
LED_L_P2: DS4.1 R20.1 | length 60.8
  Bottom Layer 1 w10: R20.1 900,2980 DS4.1
LED_R: DS5.2 DS7.2 J3.1 | length 928.3
  Top Layer w10: J3.1 5168.6,3028 5181.4,3015.2 5354.8,3015.2 v1(5398.89,2971.11) ; v1(5625,3030) 5880,3030 v1(5940,2970)
  Bottom Layer 1 w10: v1(5398.89,2971.11) 5451.11,2971.11 5487.64,3007.64 5602.64,3007.64 v1(5625,3030) ; v1(5940,2970) DS7.2
LED_R_P1: DS7.1 R26.1 | length 53.8
  Bottom Layer 1 w10: DS7.1 R26.1
LED_R_P2: DS5.1 R21.1 | length 58.8
  Bottom Layer 1 w10: DS5.1 R21.1
"M1 F": M2.1 U1.41 U5.16 | length 1136.1
  Top Layer w10: v3(3335.41,1349.59) 3336.67,1349.59 3385.43,1300.83 U5.16 ; U1.41 3396.5,2146.5 3359.02,2109.02 3359.02,2084.02 3350,2075 3350,1940 3405,1885 v3(3405,1650)
  Bottom Layer 1 w10: v3(3335.41,1349.59) 3335.41,1580.41 v3(3405,1650)
"M1 NEG": P2.2 U5.5 | length 702
  Top Layer w15: 3487.8,1007.2 U5.5
  Top Layer w25: 3487.8,1007.2 3545,950 3970,950 P2.2
"M1 POS": P2.4 U5.7 | length 519.6
  Top Layer w15: 3538.98,1003.79 U5.7
  Top Layer w25: 3538.98,1003.79 3552.76,990 3910,990 P2.4
"M1 R": M4.1 U1.42 U5.15 | length 1070.6
  Top Layer w10: v3(3400,1343.42) 3400,1341.85 3411.02,1330.82 U5.15 ; U1.42 3416.18,1983.29 3435,1964.47 M4.1 3434.38,1954.38 3434.38,1630.14 v3(3433.75,1629.52)
  Bottom Layer 1 w10: v3(3400,1343.42) 3400,1595.77 v3(3433.75,1629.52)
M1Sense1: M1S1.1 P2.3 U1.40 | length 1577.8
  Top Layer w10: v3(3370,2221.58) 3370,2223.15 3376.81,2229.97 U1.40 ; v3(3783.83,2080) 3890,1973.83 M1S1.1 3895,1935 3895,1250 3961.01,1183.99 3961.01,1182.26 3975,1168.27 P2.3
  Bottom Layer 1 w10: v3(3370,2221.58) 3370,2220 3510,2080 v3(3783.83,2080)
M1Sense2: M1S2.1 P2.5 U1.39 | length 1543.8
  Top Layer w10: v3(3345,2180) 3345,2242.51 3357.13,2254.64 U1.39 ; v3(3760,2030) 3760,2026.85 3763.3,2023.54 3763.3,2004.2 M1S2.1 3770,1960 3865,1865 3865,1185.39 3865.61,1184.77 3865.61,1164.39 P2.5
  Bottom Layer 1 w10: v3(3345,2180) 3485,2040 3748.32,2040 3758.32,2030 v3(3760,2030)
"M2 F": M1.1 U1.44 U5.9 | length 1201.1
  Top Layer w10: U1.44 3455.55,2209.45 3625,2040 M1.1 3700,1885 3700,1436.26 3564.57,1300.83 U5.9
"M2 NEG": P3.4 U5.4 | length 1041.6
  Top Layer w15: 3455,995 3462.2,1002.2 U5.4
  Top Layer w25: P3.4 2540,1045.78 2581.87,1003.91 2581.87,1003.13 2630,955 3415,955 3455,995
"M2 POS": P3.2 U5.2 | length 852.1
  Top Layer w15: 3411.02,1006.02 U5.2
  Top Layer w25: P3.2 2640,1050 2695,995 3400,995 3411.02,1006.02
"M2 R": M3.1 U1.43 U5.10 | length 1110.9
  Top Layer w10: U1.43 3435.87,2169.13 M3.1 3530,2071.21 3549.57,2051.64 3549.57,1432.47 3525,1407.91 3525,1355 3543.83,1336.17 3543.83,1315.13 3539.88,1311.19 3539.88,1276.14 U5.10
M2Sense1: M2S1.1 P3.3 U1.38 | length 1488.6
  Top Layer w10: P3.3 2540,1310 v2(2665,1435) ; v2(2795,1570) 3180,1955 3180,2055 3228.48,2103.48 M2S1.1@3229.01,2103.48 ; M2S1.1 3240,2140 3330,2230 3330,2257.75 3337.44,2265.19 U1.38
  Bottom Layer 1 w10: v2(2665,1435) 2788.09,1558.09 2788.09,1560.38 2795,1567.29 v2(2795,1570)
M2Sense2: M2S2.1 P3.5 U1.37 | length 1530.5
  Top Layer w10: P3.5 2440,1255 v2(2620,1435) ; v2(2755,1565) 3120,1930 3120,1995 M2S2.1 3125,2055 3315,2245 3315,2267.59 3317.76,2270.35 U1.37
  Bottom Layer 1 w10: v2(2620,1435) 2622.5,1435 2752.5,1565 v2(2755,1565)
NetDS1_2: DS1.2 R1.2 | length 65.5
  Top Layer w10: DS1.2 2763.76,2365 R1.2
NetDS2_2: DS2.2 R2.2 | length 70.5
  Top Layer w10: DS2.2 3998.76,2110 R2.2
NetDS8_1: DS8.1 R27.2 | length 63.8
  Top Layer w10: R27.2 DS8.1@3015,1635
NetL_R22_1: L_R22.1 L_U6.1 | length 80.7
  Top Layer w10: L_R22.1 L_U6.1@851.66,3136.24
  Top Layer w15: L_U6.1@851.66,3136.24 L_U6.1
NetP1_R5_1: P1_R5.1 P1_U2.1 | length 143.2
  Top Layer w10: P1_R5.1 4810,5661.24 4876.26,5594.98 P1_U2.1
NetP1_U2_2: P1_U2.2 P1_U3.1 | length 707.1
  Bottom Layer 1 w10: P1_U3.1 4518.94,5750.43 4557.3,5788.79 4641.21,5788.79 4710,5720 4864.17,5720 P1_U2.2
NetP2_R5_1: P2_R5.1 P2_U2.1 | length 127.4
  Top Layer w10: P2_R5.1 3930,5961.24 3985.91,5905.33 3985.91,5890.79 P2_U2.1
NetP2_U2_2: P2_U2.2 P2_U3.1 | length 652.4
  Bottom Layer 1 w10: P2_U3.1 3653.94,5950.43 3692.3,5988.79 4045.39,5988.79 P2_U2.2
NetP3_R5_1: P3_R5.1 P3_U2.1 | length 84
  Top Layer w10: P3_R5.1 3110.46,6016.24 P3_U2.1
NetP3_U2_2: P3_U2.2 P3_U3.1 | length 638.8
  Bottom Layer 1 w10: P3_U3.1 2809.5,5950.43 2882.85,6023.79 3260.39,6023.79 P3_U2.2
NetP4_R5_1: P4_R5.1 P4_U2.1 | length 79.9
  Top Layer w10: P4_R5.1 2250.46,5891.24 P4_U2.1
NetP4_U2_2: P4_U2.2 P4_U3.1 | length 688.4
  Bottom Layer 1 w10: P4_U3.1 1880.83,5790 2155,5790 2197.76,5832.76 2197.76,5866.03 2240.52,5908.79 2309.95,5908.79 2348.3,5870.43 P4_U2.2
NetP5_R5_1: P5_R5.1 P5_U2.1 | length 82.1
  Top Layer w10: P5_R5.1 1392.06,5536.24 P5_U2.1
NetP5_U2_2: P5_U2.2 P5_U3.1 | length 700.2
  Bottom Layer 1 w10: P5_U3.1 1074.5,5290.43 1200.6,5416.54 1429.85,5416.54 P5_U2.2
NetR1_1: R1.1 U1.28 | length 414.9
  Top Layer w10: R1.1 2817.23,2478.46 U1.28
NetR2_1: R2.1 U1.55 | length 612.9
  Top Layer w10: U1.55 3762.17,2517.83 3995,2285 3995,2184.53 3997.28,2182.24 R2.1@3997.28,2178.31 ; R2.1@4010,2169.53 R2.1@4006.06,2169.53 ; R2.1@3997.28,2178.31 R2.1@4006.06,2169.53 ; R2.1@3997.28,2178.31 R2.1@4006.06,2169.53
NetR8_1: R8.1 U4.1 | length 122.4
  Top Layer w10: R8.1 5235,5376.24 5290.91,5320.33 5290.91,5310.79 U4.1
NetR_R22_1: R_R22.1 R_U6.1 | length 106.3
  Top Layer w10: R_U6.1 5468.76,3182.94 R_R22.1
NRST: C7.2 J1.10 R4.2 SW2.1 U1.7 | length 1807.6
  Top Layer w10: J1.10 2569.06,1985 ; R4.2 2517.52,1640.59 SW2.1 2501.24,1635.69 C7.2 2501.24,1735 2569.06,1802.82 2569.06,1985 ; v2(2960,2130) 2714.06,2130 2569.06,1985 ; v1(3040,2210) 3260,2430 v1(3260,2470) ; v2(3260,2545) 3416.18,2701.18 U1.7
  Bottom Layer 1 w10: v2(2960,2130) v1(3040,2210) ; v1(3260,2470) v2(3260,2545)
R_IR_LED_Drain: R_J4.1 R_U7.2 | length 1133.5
  Top Layer w10: R_J4.1 5070,3105 v1(5115,3150)
  Bottom Layer 1 w10: v1(5115,3150) 5180,3215 6014.17,3215 R_U7.2
R_IR_LED_Joiner: R_U6.2 R_U7.1 | length 381.7
  Top Layer w10: R_U6.2 5941.26,3130.43 R_U7.1
RADC1: R_R23.2 R_U6.3 TP13.1 U1.30 | length 3011.8
  Top Layer w10: U1.30 3184.39,2439.09 3188.17,2442.87 3190.49,2442.87 3392.61,2645 v2(3545,2645) ; v2(3675,2645) 3675.73,2644.27 3763.48,2644.27 3977.75,2430 4770,2430 5280,2940 5562.91,2940 5568.76,2945.86 5568.76,2960 R_R23.2 5573.74,2975.02 R_U6.3 5543.52,3089.79 5500.21,3089.79 TP13.1
  Bottom Layer 1 w10: v2(3545,2645) v2(3675,2645)
RADC2: R_R24.2 R_U7.3 TP14.1 U1.34 | length 3318.9
  Top Layer w10: U1.34 3258.7,2358.7 3270,2370 v1(3670,2370) ; v2(4005,2405) 4785,2405 5295,2915 6063.76,2915 6098.76,2950 6103.76,2950 6113.76,2960 R_R24.2 6108.74,2970.02 R_U7.3 6101.69,3056.61 6068.39,3056.61 TP14.1
  Bottom Layer 1 w10: v1(3670,2370) 3705,2405 v2(4005,2405)
RX: P4.2 U1.25 | length 633
  Top Layer w10: P4.2 2874.39,2980.61 2909.39,2980.61 2980,2910 2980,2650 3092.48,2537.52 U1.25
SLEEP: U1.36 U5.1 | length 1861.4
  Top Layer w10: v3(2865,1430) 2990,1305 2990,1105 3040.24,1054.76 U5.1 ; v3(2865,1715) 2963.61,1813.61 3070,1920 3070,2030 3298.07,2258.07 U1.36
  Bottom Layer 1 w10: v3(2865,1430) v3(2865,1715)
SWCLK: J1.4 U1.49 | length 1237.6
  Top Layer w10: J1.4 2665,2135 2690,2160 v2(3035,2160) ; v2(3080,2210) 3269.72,2399.72 U1.49
  Bottom Layer 1 w10: v2(3035,2160) 3036.91,2161.91 3036.91,2166.91 v2(3080,2210)
SWDIO: J1.2 U1.46 | length 1104.6
  Top Layer w10: J1.2 3120,2185 v2(3190,2255) ; U1.46 3494.92,2262.31 3499.59,2257.64 v2(3499.59,2254.93)
  Bottom Layer 1 w10: v2(3190,2255) 3499.52,2255 v2(3499.59,2254.93)
TX: P4.3 U1.24 | length 689.7
  Top Layer w10: P4.3 3010,2945 3010,2645 3097.45,2557.55 3157.96,2557.55 U1.24
UserSwitch1: R3.1 SW1.8 U1.57 | length 990.6
  Top Layer w10: U1.57 3746.58,2557.2 4015,2288.79 4015,2256.05 4043.03,2228.03 4043.03,2031.26 SW1.8
  Bottom Layer 1 w10: SW1.8 4218.76,1965 R3.1
UserSwitch2: R14.1 SW1.7 U1.58 | length 909.1
  Top Layer w10: U1.58 3748.11,2576.89 4030,2295 4030,2262.27 4060,2232.27 4060,2114.29 SW1.7
  Bottom Layer 1 w10: SW1.7 R14.1
UserSwitch3: R15.1 SW1.6 U1.59 | length 833.9
  Top Layer w10: U1.59 3753.43,2596.57 4045,2305 4045,2268.48 4103.48,2210 4103.48,2170.81 SW1.6
  Bottom Layer 1 w10: SW1.6 4218.76,2165 R15.1
VCC: C10.2 C14.2 P6.2 U5.12 U8.3 | length 790.6
  Top Layer w15: U5.12 3488.28,1275.72 3488.28,1359.52 3488.76,1360
  Top Layer w30: P6.2 3200,1262.02 3328.51,1390.53 ; U8.3 3328.51,1390.53 ; 3488.76,1360 3488.76,1365 3496.01,1372.24 C10.2@3496.01,1390 ; C14.2@3496.01,1460 C10.2@3496.01,1390 ; 3328.51,1390.53 3495.48,1390.53 C10.2@3496.01,1390
pads on no net: J1.6 J1.7 J1.8 U1.2 U1.3 U1.4 U1.5 U1.6 U1.21 U1.29 U1.50 U1.51 U1.52 U1.53 U1.54 U1.56 U1.61 U1.62 U8.4

## Polygon pours and split planes (outlines as drawn)
GND on Bottom Layer 1 "GNDP" (solid, pour order 0): 175,3260 180,3255 180,2870 1125,2870 1220,2755 1240,2730 1355,2560 1375,775 1730,515 2450,15 3997.95,15 5065,785 5081.19,2547.96 5300,2855 5325,2870 6255,2870 6255,3255 6250,3260 5135,3250 4635,2571.82 4515,2465 4215,2465 4070,2585 4040,2610 3722.5,3312.5 3410,4040 3415,4045 3415,5620 3517.58,5722.58 3950,5655 4255,5580 4660,5430 5060.71,5220 5189.71,5140 5320,5055 5455,5055 5550,5140 5555,5310 5395,5455 5189.71,5580 4795.93,5779.07 4462.5,5912.5 4155,5995 3760,6075 3610,6095 2849.91,6095 2360,6015 2022.93,5922.07 1700,5805 1400,5665 1025,5440 930,5370 870,5275 870,5174.65 940.48,5070.17 1115,5055 1525,5300 1775,5420 2045.03,5540.68 2078.91,5550.24 2585,5675 2902.91,5711.48 3025,5644.16 3025,4025 2705,3262.06 2355,2555 2260,2495 2195,2465 1980,2465 1843.34,2526.66 1270,3255

## Silkscreen, mask and mechanical layers (free items; w line width, h text height)
Top Overlay:
  text "IR LED" at 1443.93,2927.54 h30 r305
  text "Colour LED" at 1343.93,2882.54 h30 r305
  text "IR LED" at 4887.54,2813.93 h30 r55
  text "Colour LED" at 4907.54,2673.93 h30 r55
  text "Boot" at 4515,2255 h30
  text "S1" at 4515,2155 h30
  text "S2" at 4515,2055 h30
  text "S3" at 4515,1950 h30
  text "B1" at 2858.14,1925.02 h50
  text "B2" at 2858.14,1735.02 h50
  text "NRST" at 2355,1480 h50
  text "QUT EGB220  / Line Following Robot  / V02" at 2215.33,30 h60
Mechanical 1:
  lines w0.5: 197.1,2868.36 cw(c197.1,3065.21) 197.1,3262.06 ; 197.35,2868.36 1088.02,2868.36 ; 197.35,3262.06 1251.98,3262.06 ; 1087.77,2868.36 cw(c1087.77,2789.62) 1152.27,2834.78 ; 1152.52,2834.78 1336.65,2571.82 ; 1251.73,3262.06 cw(c1251.73,3104.58) 1380.73,3194.91 ; 1336.4,2571.82 cw(c1271.9,2526.66) 1350.64,2526.66 ; 1350.64,802.94 ccw(c1429.38,802.94) 1384.07,738.54 ; 1350.89,802.94 1350.89,2526.66 ; 1380.98,3194.91 1767.34,2643.14 ; 1384.32,738.54 2413.19,14.59 ; 1767.09,2643.14 ccw(c2089.59,2868.96) 2451.45,2713.86 ; 2412.94,14.59 ccw(c2458.25,78.99) 2458.25,0.25 ; 2451.7,2713.86 2992.29,3975.18 ; 2458.5,0.25 3983.45,0.25 ; 2992.04,3975.18 ccw(c2630.17,4130.28) 3023.87,4130.28 ; 3023.87,5546.62 ccw(c2866.39,5546.62) 2849.91,5703.23 ccw(c3220.72,2179.38) 1169.33,5068.47 cw(c1055.37,5228.98) 941.4,5389.48 cw(c3220.72,2179.38) 5500.04,5389.48 cw(c5386.08,5228.98) 5272.11,5068.47 ccw(c3220.72,2179.38) 3591.53,5703.23 ccw(c3575.05,5546.62) 3417.57,5546.62 ; 3024.12,4130.28 3024.12,5546.62 ; 3417.57,4130.28 ccw(c3811.27,4130.28) 3449.41,3975.18 ; 3417.82,4130.28 3417.82,5546.62 ; 3449.66,3975.18 3990.24,2713.86 ; 3983.2,0.25 ccw(c3983.2,78.99) 4028.51,14.59 ; 3989.99,2713.86 ccw(c4351.86,2868.96) 4674.36,2643.14 ; 4028.76,14.59 5057.62,738.54 ; 4674.61,2643.14 5060.96,3194.91 ; 5057.37,738.54 ccw(c5012.06,802.94) 5090.8,802.94 ; 5060.71,3194.91 cw(c5189.71,3104.58) 5189.71,3262.06 ; 5090.8,2526.66 cw(c5169.54,2526.66) 5105.04,2571.82 ; 5091.05,802.94 5091.05,2526.66 ; 5105.29,2571.82 5289.42,2834.78 ; 5189.96,3262.06 6244.59,3262.06 ; 5289.17,2834.78 cw(c5353.67,2789.62) 5353.67,2868.36 ; 5353.92,2868.36 6244.59,2868.36 ; 6244.34,2868.36 ccw(c6244.34,3065.21) 6244.34,3262.06

## Text inside footprints (layer, text, board x,y; h text height)
P2: Top Overlay "1" at 4070,1235 h50
P3: Top Overlay "1" at 2640,1225 h50
U8: Mechanical 7 "Default Pin Padstyle: RX35Y58D0T" at 2837.51,1212.5 h50; Mechanical 7 "Alt 1 Padstyle: OX60Y90D30P" at 2900.01,1162.5 h50; Mechanical 7 "Alt 2 Padstyle: OX90Y60D30P" at 2900.01,1112.5 h50; Mechanical 7 "0.287in/7.29mm" at 3539.51,1657.5 h25; Mechanical 7 "0.03in/0.762mm" at 3464.51,1786 h25; Mechanical 7 "0.091in/2.311mm" at 3098.26,1331.5 h25; Mechanical 7 "0.033in/0.838mm" at 3052.76,1431.5 h25; Mechanical 7 "0.264in/6.706mm" at 3143.76,1933.5 h25; Mechanical 7 "0.146in/3.708mm" at 2798.01,1657.5 h25